# Altium PCB ad.pcbdoc
Units mil, origin at the board's own origin, x right, y up, seen from the top; angles counter-clockwise.
Board outline 9530 x 6960 mil, 2 copper layers (Top Layer, Bottom Layer); 83 components, 111 nets, 307 pads, 83 vias.
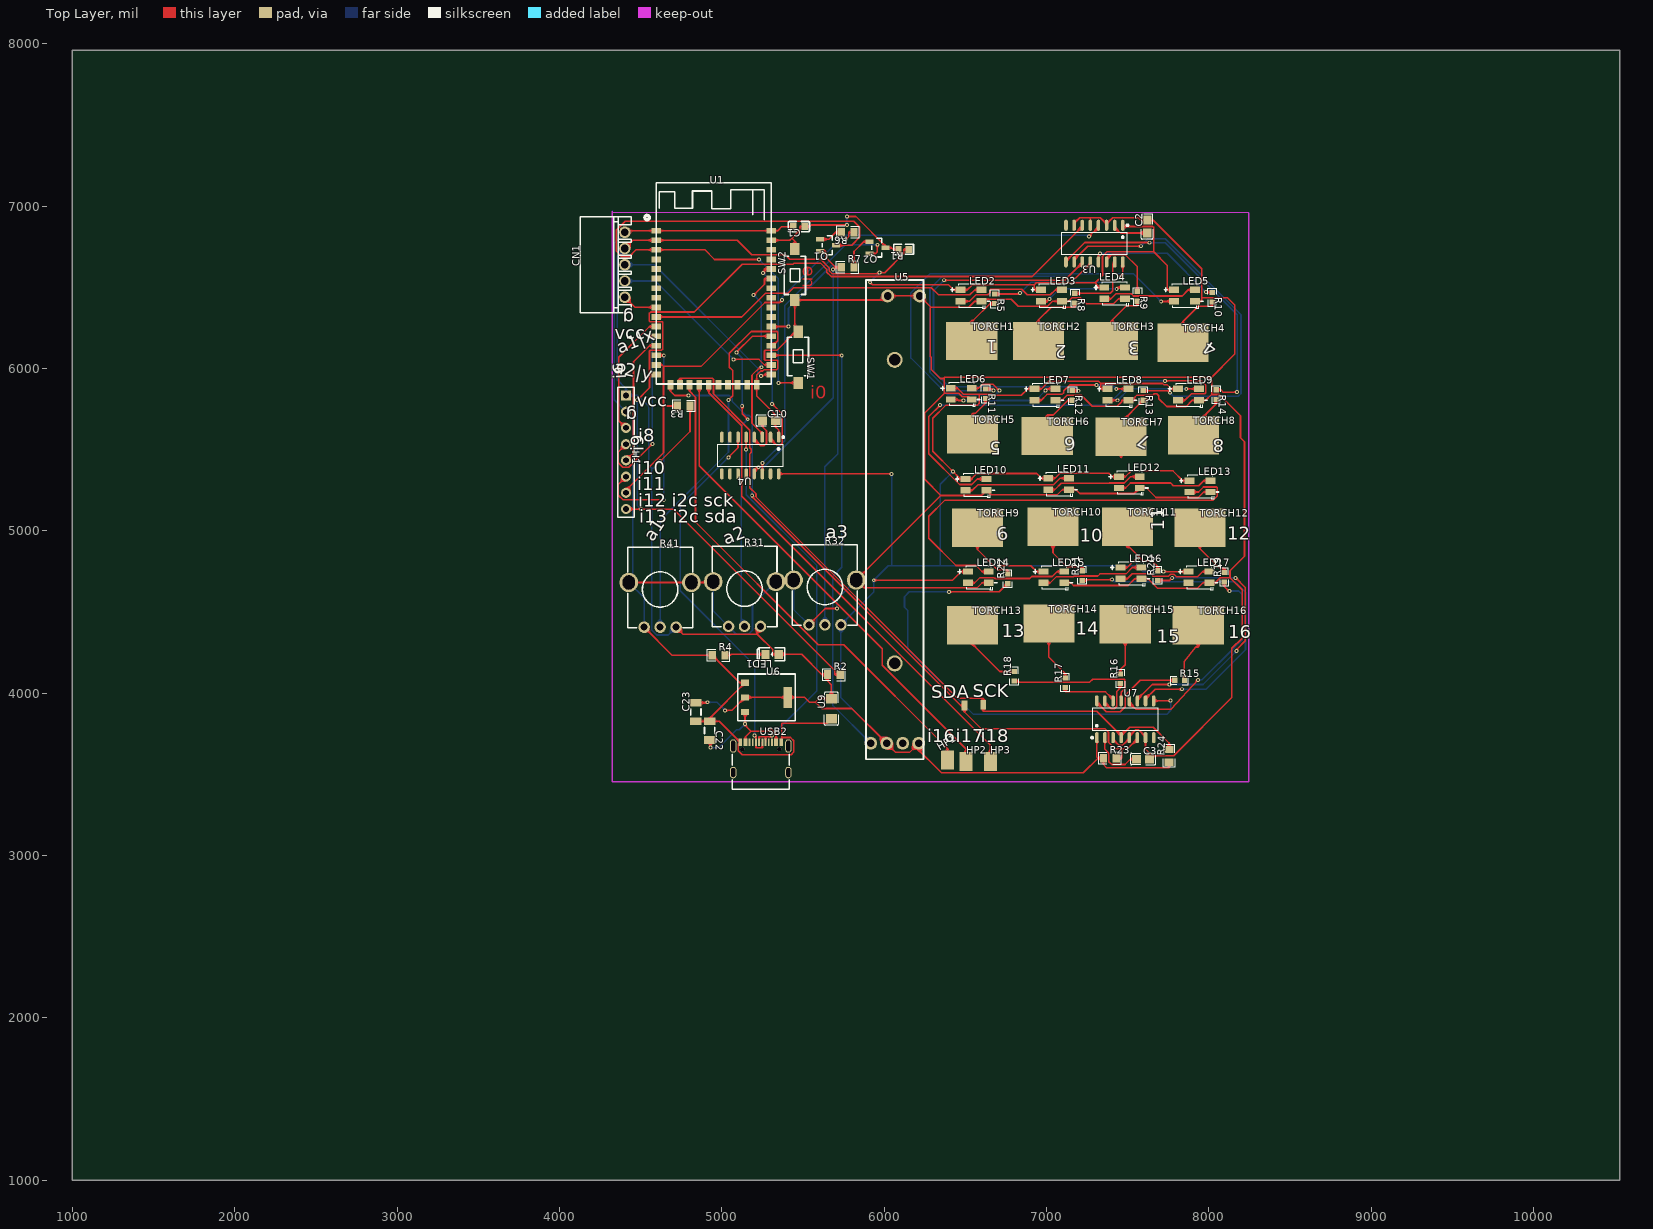
[diagram p0: Top Layer view]
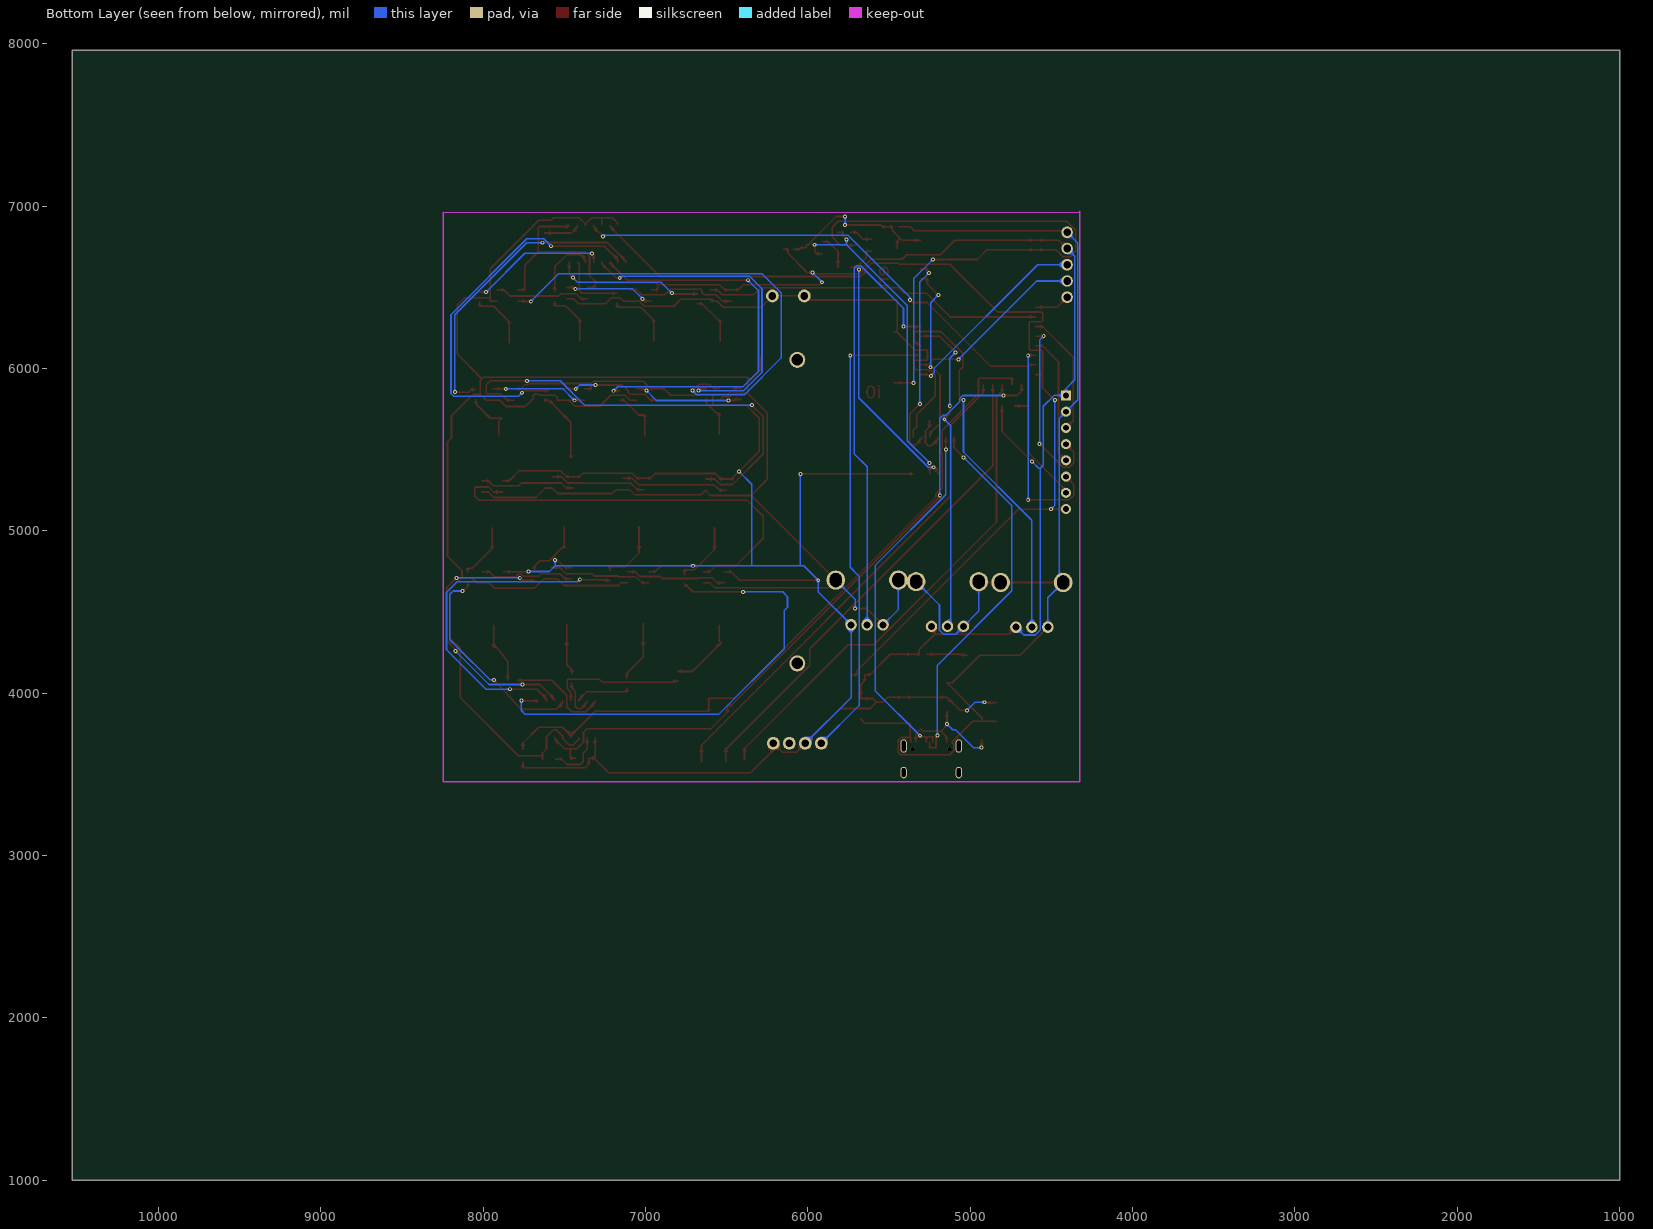
[diagram p1: Bottom Layer view, seen from below]

## Layer stack, top to bottom
Top Layer: signal copper (thickness not stored)
Dielectric: dielectric 12.6, FR-4, Dk 4.8
Bottom Layer: signal copper (thickness not stored)

## Board outline
10530,1000 1000,1000 1000,7960 10530,7960

## Components (designator, comment, footprint, x,y, rotation, side; value= is the part's Value field where it differs from the comment)
C1 "1u" C0603 5475,6875 r180 top
C2 "100nF" C0805 7620,6875 r90 top
C3 "100nF" C0805 7595,3595 r0 top
C10 "1uF" C0805 5290,5680 r0 top
C22 "10u" C1206#1 4925,3770 r270 top
C23 "10u" C1206#1 4840,3885 r90 top
CN1 "5264-5AWD" CONN-TH_5P-P2.50_5264-5AWD 4375,6640 r90 top
H1 "HDR-F-2.54_1x8" HDR-F-2.54_1X8 4410,5535 r270 top
HP1 "焊盘" 焊盘 6390,3590 r0 top
HP2 "焊盘" 焊盘 6505,3580 r0 top
HP3 "焊盘" 焊盘 6655,3580 r0 top
LED1 "LED-0805_G" LED0805_GREEN 5310,4240 r180 top
LED2 "WS2812B-MINI" LED-SMD_4P-L3.5-W3.5-TL_WS2812B 6535,6450 r0 top
LED3 "WS2812B-MINI" LED-SMD_4P-L3.5-W3.5-TL_WS2812B 7030,6450 r0 top
LED4 "WS2812B-MINI" LED-SMD_4P-L3.5-W3.5-TL_WS2812B 7420,6465 r0 top
LED5 "WS2812B-MINI" LED-SMD_4P-L3.5-W3.5-TL_WS2812B 7850,6450 r0 top
LED6 "WS2812B-MINI" LED-SMD_4P-L3.5-W3.5-TL_WS2812B 6475,5845 r0 top
LED7 "WS2812B-MINI" LED-SMD_4P-L3.5-W3.5-TL_WS2812B 6990,5840 r0 top
LED8 "WS2812B-MINI" LED-SMD_4P-L3.5-W3.5-TL_WS2812B 7440,5840 r0 top
LED9 "WS2812B-MINI" LED-SMD_4P-L3.5-W3.5-TL_WS2812B 7875,5840 r0 top
LED10 "WS2812B-MINI" LED-SMD_4P-L3.5-W3.5-TL_WS2812B 6565,5285 r0 top
LED11 "WS2812B-MINI" LED-SMD_4P-L3.5-W3.5-TL_WS2812B 7075,5290 r0 top
LED12 "WS2812B-MINI" LED-SMD_4P-L3.5-W3.5-TL_WS2812B 7510,5300 r0 top
LED13 "WS2812B-MINI" LED-SMD_4P-L3.5-W3.5-TL_WS2812B 7945,5275 r0 top
LED14 "WS2812B-MINI" LED-SMD_4P-L3.5-W3.5-TL_WS2812B 6580,4715 r0 top
LED15 "WS2812B-MINI" LED-SMD_4P-L3.5-W3.5-TL_WS2812B 7045,4715 r0 top
LED16 "WS2812B-MINI" LED-SMD_4P-L3.5-W3.5-TL_WS2812B 7520,4740 r0 top
LED17 "WS2812B-MINI" LED-SMD_4P-L3.5-W3.5-TL_WS2812B 7940,4715 r0 top
Q1 "S8050" SOT-23-3_L2.9-W1.3-P1.90-LS2.4-BR 5655,6760 r180 top
Q2 "S8050" SOT-23-3_L2.9-W1.3-P1.90-LS2.4-BR 5960,6745 r180 top
R1 "10k" R0603#1 6120,6735 r180 top
R2 "4.7kΩ" R0805 5690,4115 r0 top
R3 "4.7kΩ" R0805 4765,5770 r180 top
R4 "1kΩ" R0805 4980,4235 r0 top
R5 "1kΩ" R0603#2 6680,6430 r270 top
R6 "10kΩ" R0805 5775,6840 r180 top
R7 "10kΩ" R0805 5775,6625 r0 top
R8 "1kΩ" R0603#2 7175,6435 r270 top
R9 "1kΩ" R0603#2 7560,6445 r270 top
R10 "1kΩ" R0603#2 8020,6440 r270 top
R11 "1kΩ" R0603#2 6625,5845 r270 top
R12 "1kΩ" R0603#2 7160,5835 r270 top
R13 "1kΩ" R0603#2 7595,5835 r270 top
R14 "1kΩ" R0603#2 8045,5840 r270 top
R15 "1kΩ" R0603#2 7820,4080 r0 top
R16 "1kΩ" R0603#2 7455,4090 r90 top
R17 "1kΩ" R0603#2 7115,4065 r90 top
R18 "1kΩ" R0603#2 6800,4105 r90 top
R19 "1kΩ" R0603#2 8095,4715 r90 top
R20 "1kΩ" R0603#2 7685,4725 r90 top
R21 "1kΩ" R0603#2 7220,4725 r90 top
R22 "1kΩ" R0603#2 6760,4705 r90 top
R23 "4.7kΩ" R0805 7390,3600 r0 top
R24 "4.7kΩ" R0805 7755,3615 r90 top
R31 "10kΩ" RES-ADJ-TH_RK09K1130AJ3 5140,4550 r0 top
R32 "10kΩ" RES-ADJ-TH_RK09K1130AJ3 5635,4560 r0 top
R41 "10kΩ" RES-ADJ-TH_RK09K1130AJ3 4620,4545 r0 top
SW1 "TS-1101-C-W" SW-SMD_L6.0-W3.3-LS8.0 5470,6070 r270 top
SW2 "TS-1101-C-W" SW-SMD_L6.0-W3.3-LS8.0 5450,6580 r90 top
TORCH1 "torch 4x6" ?单面焊盘 6540,6170 r0 top
TORCH2 "torch 4x6" ?单面焊盘 6950,6170 r0 top
TORCH3 "torch 4x6" ?单面焊盘 7405,6170 r0 top
TORCH4 "torch 4x6" ?单面焊盘 7840,6160 r0 top
TORCH5 "torch 4x6" ?单面焊盘 6545,5595 r0 top
TORCH6 "torch 4x6" ?单面焊盘 7005,5585 r0 top
TORCH7 "torch 4x6" ?单面焊盘 7460,5580 r0 top
TORCH8 "torch 4x6" ?单面焊盘 7905,5590 r0 top
TORCH9 "torch 4x6" ?单面焊盘 6575,5020 r0 top
TORCH10 "torch 4x6" ?单面焊盘 7040,5025 r0 top
TORCH11 "torch 4x6" ?单面焊盘 7500,5025 r0 top
TORCH12 "torch 4x6" ?单面焊盘 7945,5020 r0 top
TORCH13 "torch 4x6" ?单面焊盘 6545,4420 r0 top
TORCH14 "torch 4x6" ?单面焊盘 7015,4430 r0 top
TORCH15 "torch 4x6" ?单面焊盘 7485,4425 r0 top
TORCH16 "torch 4x6" ?单面焊盘 7935,4420 r0 top
U1 "ESP32S2" ESP32S2 4595,6850 r0 top
U3 "SCT80S16B" SOP-16_L10.0-W3.9-P1.27-LS6.0-BL 7295,6770 r180 top
U4 "CH340C" SOP-16_L10.0-W3.9-P1.27-LS6.0-BL 5175,5465 r180 top
U5 "B10K滑动电位器" B10K 6065,5070 r0 top
U6 "AMS1117-3.3" AM1117 5275,3975 r0 top
U7 "SCT80S16B" SOP-16_L10.0-W3.9-P1.27-LS6.0-BL 7485,3840 r0 top
U9 "10uF" C1206#2 5675,3905 r90 top
USB2 "TYPE-C16PIN" USB-C-SMD_TYPE-C16PIN 5240,3605 r0 top

## Footprints (in the part's own frame and the unit in brackets; to place one, negate y for a bottom-side part, rotate by r counter-clockwise, add the part's x,y. Pads: shape width x height; smd on the part's side, far side on the other; paste and mask are expansions set on the pad)
?单面焊盘 [mm]
  rect 8x6 smd paste+0 mask+0.102: 1(0,0)
AM1117 [mm]
  rect 1.3x0.95 smd paste+0 mask+0.051: 1(-3.35,2.29) 2(-3.35,0) 3(-3.35,-2.29)
  rect 1.3x3.25 smd paste+0 mask+0.051: 4(3.35,0)
  silkscreen extent -4.5,-3.65 4.5,3.65
B10K [mm]
  round 2 hole 1.2 paste+0 mask+0.102: 1a(-1.25,-35) 1b(3.75,-35) 2a(-3.75,-35) 2b(1.25,-35) 3a(-1.102,35) 3b(3.898,35)
  round 2.5 hole 1.8 paste+0 mask+0.102: 9(0,25) 10(0,-22.5)
  silkscreen extent -4.5,-37.5 4.5,37.5
C0603 [mm]
  rect 1x1.1 smd paste+0 mask+0.102: 1(-0.9,0) 2(0.9,0)
  silkscreen extent -1.65,-0.8 1.65,0.8
C0805 [mm]
  rect 1.41x1.35 smd paste-100 mask+0.051: 1(-1,0) 2(1,0)
  silkscreen extent -1.96,-0.9 1.96,0.9
C1206#1 [mm]
  rect 1.2x1.8 smd paste+0 mask+0.051: 1(-1.45,0) 2(1.45,0)
  silkscreen extent -0.5,-0.8 0.5,0.8
C1206#2 [mm]
  rect 1.485x1.728 smd paste-100 mask+0.051: 1(-1.593,0) 2(1.593,0)
  silkscreen extent -2.56,-1.09 2.56,1.09
CONN-TH_5P-P2.50_5264-5AWD [mm]
  round 1.8 hole 1.2 paste+0 mask+0.051: 1(-5.08,-0.7) 2(-2.54,-0.7) 3(0,-0.7) 4(2.54,-0.7) 5(5.08,-0.7)
  silkscreen extent -7.5,-1.7 7.5,6.3
ESP32S2 [mm]
  rect 1.5x0.9 smd paste+0 mask+0.051: 1(0,-0.006) 2(0,-1.505) 3(0,-3.006) 4(0,-4.505) 5(0,-6.006) 6(0,-7.505) 7(0,-9.006) 8(0,-10.505) 9(0,-12.006) 10(0,-13.505) 11(0,-15.006) 12(0,-16.505) 13(0,-18.006) 14(0,-19.505) 15(0,-21.006) 16(0,-22.505) 27(18,-22.505) 28(18,-21.006) 29(18,-19.505) 30(18,-18.006) 31(18,-16.505) 32(18,-15.006) 33(18,-13.505) 34(18,-12.006) 35(18,-10.505) 36(18,-9.006) 37(18,-7.505) 38(18,-6.006) 39(18,-4.505) 40(18,-3.006) 41(18,-1.505) 42(18,-0.006)
  rect 0.9x1.5 smd paste+0 mask+0.051: 17(2.25,-24.1) 18(3.75,-24.1) 19(5.25,-24.1) 20(6.75,-24.1) 21(8.25,-24.1) 22(9.75,-24.1) 23(11.25,-24.1) 24(12.75,-24.1) 25(14.25,-24.1) 26(15.75,-24.1)
  silkscreen extent -1.76,-24 18,7.5
HDR-F-2.54_1X8 [mil]
  rect 62x62 hole 35 paste+0 mask+2: 1(-300,0)
  round 62 hole 35 paste+0 mask+2: 2(-200,0) 3(-100,0) 4(0,0) 5(100,0) 6(200,0) 7(300,0) 8(400,0)
  silkscreen extent -350,-50 450,50
LED0805_GREEN [mil]
  rect 51.2x55.1 smd paste+0 mask+2: 1(-41.35,0) 2(41.35,0)
  silkscreen extent -79,-39 91,39
LED-SMD_4P-L3.5-W3.5-TL_WS2812B [mm]
  rect 1.545x0.997 smd paste+0 mask+0.051: 1(-1.638,0.89) 2(-1.638,-0.89) 3(1.638,-0.89) 4(1.638,0.89)
  silkscreen extent -3.17,-2.04 2.92,1.82
R0603#1 [mm]
  rect 1x1.1 smd paste+0 mask+0.102: 1(-0.8,0) 2(0.8,0)
  silkscreen extent -1.55,-0.8 1.55,0.81
R0603#2 [mm]
  rect 0.806x0.864 smd paste-100 mask+0.051: 1(-0.753,0) 2(0.753,0)
  silkscreen extent -1.39,-0.66 1.39,0.66
R0805 [mil]
  rect 44.59x54.21 smd paste-3937.01 mask+2: 1(-39.37,0) 2(39.37,0)
  silkscreen extent -69,-36 69,36
RES-ADJ-TH_RK09K1130AJ3 [mm]
  round 1.8 hole 1.1 paste+0 mask+0.051: 1(-2.5,-3.5) 2(0,-3.5) 3(2.5,-3.5)
  oval 2.9x3 hole 1.9 slot 2.2 at 90 deg paste+0 mask+0.051: 4(-4.9,3.5) 5(4.9,3.5)
  silkscreen extent -5.08,-3.56 5.08,9.02
SOP-16_L10.0-W3.9-P1.27-LS6.0-BL [mm]
  oval 0.56x1.745 smd paste+0 mask+0.051: 1(-4.445,-2.873) 2(-3.175,-2.873) 3(-1.905,-2.873) 4(-0.635,-2.873) 5(0.635,-2.873) 6(1.905,-2.873) 7(3.175,-2.873) 8(4.445,-2.873) 9(4.445,2.873) 10(3.175,2.873) 11(1.905,2.873) 12(0.635,2.873) 13(-0.635,2.873) 14(-1.905,2.873) 15(-3.175,2.873) 16(-4.445,2.873)
  silkscreen extent -5.33,-3.02 5.08,1.77
SOT-23-3_L2.9-W1.3-P1.90-LS2.4-BR [mm]
  rect 1.25x0.7 smd paste+0 mask+0.102: 1(1.25,-0.95) 2(1.25,0.95) 3(-1.25,0)
  silkscreen extent -0.65,-1.46 0.9,1.46
SW-SMD_L6.0-W3.3-LS8.0 [mm]
  rect 1.9x1.5 smd paste+0 mask+0.051: 1(-4,0) 2(4,0)
  silkscreen extent -3.14,-1.67 2.86,1.63
USB-C-SMD_TYPE-C16PIN [mm]
  oval 1x2.1 hole 0.6 slot 1.7 at 90 deg paste+0 mask+0.051: 1(-4.32,1.787) 2(4.32,1.787)
  oval 1x1.8 hole 0.6 slot 1.4 at 90 deg paste+0 mask+0.051: 3(-4.32,-2.362) 4(4.32,-2.362)
  rect 0.6x1.15 smd paste-100 mask+0.051: A1B12(-3.2,2.362) A4B9(-2.4,2.362) B1A12(3.2,2.362) B4A9(2.4,2.362)
  rect 0.3x1.15 smd paste-100 mask+0.051: A5(-1.25,2.362) A6(-0.25,2.362) A7(0.25,2.362) A8(-1.75,2.362) B5(1.75,2.362) B6(0.75,2.362) B7(-0.75,2.362) B8(1.25,2.362)
  round 0.65 hole 0.65 unplated paste+0: ""(-2.89,1.288) ""(2.89,1.288)
  silkscreen extent -4.45,-5 4.45,0.52
焊盘 [mm]
  rect 2x3 smd paste+0 mask+0.051: 1(0,0)

## Free pads (board coordinates)
  rect 35.43x59.05 smd paste+0 mask+2: 1(6495,3925) 2(6610,3930)

## Via types
v1: diameter 24.02, hole 12.01, Top Layer to Bottom Layer, tented both sides, 75 vias
v2: diameter 24.41, hole 12.2, Top Layer to Bottom Layer, tented both sides, 8 vias

## Nets (pads, with @x,y where several pads share a name; then routed paths per layer and width w, separated by ;. In a path a pad name is that pad's centre, name@x,y a point inside that pad or via, vN(x,y) a via of type N, cw(c..) or ccw(c..) an arc to the next point about the centre after c; other vN are vias at no path point)
ADC1: R41.2 U1.30 | length 2342.7
  Top Layer w10: v1(5041.14,5806.54) 5066.7,5832.1 5066.7,5988.7 5046.7,6008.7 5046.7,6094.5 5181.2,6229 5341.3,6229 5344.2,6226 5344.2,6171.7 5313.7,6141.1 U1.30
  Bottom Layer w10: R41.2 4620,5065.24 5041.14,5486.38 v1(5041.14,5806.54)
ADC2: R31.2 U1.31 | length 1997.5
  Top Layer w10: v1(5089.27,6100.27) 5189.2,6200.2 U1.31 ; v1(5125.75,5770.33) 5125.75,5722.38 v1(5159.86,5688.27)
  Bottom Layer w10: v1(5089.27,6100.27) 5125.75,6063.79 v1(5125.75,5770.33) ; R31.2 5120.52,4431.68 5120.52,5648.93 v1(5159.86,5688.27)
ADC3: R32.2 U1.32 | length 2867.4
  Top Layer w10: U1.32 v1(5410.86,6259.23)
  Bottom Layer w10: v1(5410.86,6259.23) 5410.86,6371.1 5673.71,6633.95 5699.04,6633.95 5714.71,6618.28 5714.71,5474.56 5635,5394.85 R32.2
C10_1: C10.1 U4.4 | length 261.1
  Top Layer w10: U4.4 5200,5564.1 5239.3,5524.7 5258.4,5524.7 5275,5541.3 5275,5618.1 5250.6,5642.4 C10.1
CN1_1: CN1.1 U1.9 | length 218.4
  Top Layer w10: CN1.1 4465.2,6377.3 U1.9
CN1_2: CN1.2 U1.28 | length 1115.3
  Top Layer w10: v1(5072.76,6056.8) 5229.35,6056.8 5263.14,6023.01 ; 5263.1,6023 U1.28
  Bottom Layer w10: CN1.2 4589.56,6540 v1(5072.76,6056.8)
CN1_3: CN1.3 U1.27 | length 1203.9
  Top Layer w10: v1(5241.91,5955.55) 5254.73,5955.55 5263.14,5963.96 ; 5263.1,5964 U1.27
  Bottom Layer w10: CN1.3 4584.34,6640 5220.42,6003.92 5220.42,5977.04 v1(5241.91,5955.55)
D+: U4.5 USB2.A6 USB2.B6 | length 2283.1
  Top Layer w10: v1@5150,5502.9 U4.5 ; 5230.15,3731.64 5230.22,3731.71 5269.52,3731.71 ; USB2.A6 5230.2,3731.6 ; USB2.B6 USB2.B6@5269.52,3714.83 ; USB2.B6@5269.5,3714.8 5269.5,3731.6 ; 5269.52,3731.64 5269.52,3731.71 ; v1(5308.29,3738.75) 5301.25,3731.71 5269.52,3731.71
  Bottom Layer w10: v1(5150,5502.85) 5150,5223.28 5585.79,4787.49 5585.79,4016.25 v1(5308.29,3738.75)
D-: U4.6 USB2.A7 USB2.B7 | length 2327.5
  Top Layer w10: v1(5040.25,5452.88) 5100,5512.6 U4.6 ; v1@5201.7,3740.4 5210.5,3731.6 USB2.B7 ; 5210.47,3664.38 5210.54,3664.31 5249.77,3664.31 5249.84,3664.38 ; USB2.B7@5210.47,3681.2 USB2.B7 ; 5210.5,3664.4 USB2.B7@5210.5,3681.2 ; 5249.8,3664.4 USB2.A7
  Bottom Layer w10: v1(5040.25,5452.88) 4744.01,5156.64 4744.01,4631.5 5201.75,4173.76 v1(5201.75,3740.36)
DTR: Q1.2 R7.1 U4.13 | length 1692
  Top Layer w10: U4.13 5200,5366.9 v1(5225.75,5392.62) ; Q1.2 5641.4,6722.6 5641.4,6683.42 5699.82,6625 ; v1(5685.65,6610.83) 5699.82,6625 ; R7.1 5699.8,6625
  Bottom Layer w10: v1(5225.75,5392.62) 5257.63,5392.62 5685.65,5820.64 v1(5685.65,6610.83)
EN: C1.1 Q2.3 R1.2 SW2.2 U1.41 | length 1055.8
  Top Layer w10: U1.41 5418.5,6790.7 5431.8,6804.1 ; SW2.2 5450,6785.9 ; 5450,6785.87 5431.82,6804.06 5479.76,6852 5479.76,6875 ; 5479.8,6875 5495.1,6875 C1.1 ; C1.1 5541.1,6875 5551.26,6885.15 v1(5769.94,6885.15) ; v1(5769.94,6936.87) 5826.2,6936.9 Q2.3@6018.1,6745 ; Q2.3 Q2.3@6018.1,6745 ; R1.2 6054.8,6735 6044.8,6745 Q2.3@6018.1,6745
  Bottom Layer w10: v1(5769.94,6885.15) v1(5769.94,6936.87)
GND: C1.2 C2.2 C3.2 C10.2 C22.1 C23.1 CN1.5 H1.2 LED2.3 LED3.3 LED4.3 LED5.3 LED6.3 LED7.3 LED8.3 LED9.3 LED10.3 LED11.3 LED12.3 LED13.3 LED14.3 LED15.3 LED16.3 LED17.3 R4.1 R31.1 R31.4 R31.5 R32.1 R32.4 R32.5 R41.1 R41.4 R41.5 SW1.1 SW2.1 U1.1 U1.26 U1.42 U3.3 U3.5 U3.7 U4.1 U5.3a U5.3b U6.1 U7.3 U7.5 U7.7 U9.1 USB2.A1B12 USB2.B1A12 | length 25656.1
  Top Layer w10: CN1.5 4412.3,6849.8 U1.1 5263.1,6849.8 U1.42 ; R41.4 R41.5 4942.1,4682.8 R31.4 ; R41.1 4693.8,4235 R4.1 5110.5,4065.2 U6.1 4925,3847.1 C22.1 ; C23.1 C22.1 ; 5215.08,5860.66 5215.08,5831.86 5329.37,5717.57 ; 5215.1,5860.7 5215.1,5880.9 U1.26 5215.1,5941.7 5215.1,5961.3 5239.3,5985.6 5253,5985.6 5261.7,5994.2 5337.8,5994.2 5344.2,6000.7 5344.2,6048.9 5341.3,6051.8 5267.5,6051.8 5263.1,6056.2 5263.1,6109.4 5266,6112.3 5337.8,6112.3 5450,6224.6 SW1.1@5450,6227.5 ; U1.42 5323.92,6849.78 5344.2,6849.8 5369.4,6875 C1.2 ; C10.2@5329.37,5661.22 C10.2 ; C10.2@5329.4,5661.2 5329.4,5642.4 5350,5621.8 U4.1 ; C10.2 5329.4,5717.6 ; R31.5 5342.9,4697.8 R32.4 ; USB2.B1A12 5366,3724 5370,3728.1 5422.8,3728.1 5442.9,3707.9 5442.9,3638.2 5426.9,3622.2 5125.6,3622.2 5101.5,3646.3 5101.5,3685.5 USB2.A1B12 4984.9,3827.1 C22.1 ; 5370,3728.06 5370,3812.15 5370,3816.17 ; 5370,3816.2 5648.9,3816.2 U9.1 ; SW1.1 SW1.1@5450,6227.48 ; R32.1 5636.8,4522.43 v1(5708.38,4522.43) ; U5.3a 5996.2,6422.5 SW2.1 SW1.1@5450,6227.5 ; U5.3a U5.3b 6288.09,6378.34 ; 6369.06,5947.97 7998.13,5947.97 8008.07,5938.03 8016.93,5929.17 8016.93,5841.02 7980.87,5804.96 ; 6371.25,5847.61 6369.06,5849.8 6369.06,5938.93 6346.07,5938.93 6290,5995 6290,6070 6285,6075 6285,6375.25 6288.09,6378.34 ; LED6.3 6522.5,5827 6480.5,5827 6459.8,5847.6 6371.3,5847.6 6250,5726.4 6250,5317.9 6349,5218.9 ; 6558.07,6414.96 6521.45,6378.34 6369.06,6378.34 6288.09,6378.34 ; 6558.1,6415 6578.8,6415 6591.1,6427.3 6783.1,6427.3 6826.1,6384.3 7006,6384.3 7036.7,6415 LED3.3 ; LED2.3@6578.77,6414.96 LED2.3 ; LED14.3@6623.77,4679.96 LED14.3 ; LED14.3@6623.8,4680 6603.1,4680 6572.4,4649.3 5876.4,4649.3 R32.5 6349,5218.9 ; LED10.3 LED10.3@6630.62,5249.96 ; LED7.3 LED7.3@7075.17,5804.96 ; LED7.3@7075.2,5805 7095.9,5805 ; LED3.3 LED3.3@7115.17,6414.96 ; 7095.87,5804.96 7126.49,5835.58 7214.48,5835.58 7282.08,5767.98 7434.13,5767.98 7463.07,5796.92 7463.07,5804.96 ; LED15.3 7150.9,4680 ; LED3.3@7115.2,6415 7135.9,6415 ; 7135.87,6414.96 7158.57,6437.66 7208.42,6437.66 7246.81,6399.27 7412.38,6399.27 7443.07,6429.96 ; LED11.3 LED11.3@7160.17,5254.96 ; LED11.3 7098.1,5255 7067.4,5224.3 6656.3,5224.3 6630.6,5250 6599.5,5218.9 6349,5218.9 ; 7150.87,4679.96 7166.4,4664.43 7502.54,4664.43 7543.07,4704.96 ; LED11.3@7160.2,5255 7180.9,5255 7204.9,5230.9 7540.5,5230.9 LED12.3 ; U3.7 7170,6894.8 7205.1,6929.9 7270,6929.9 ; U3.5 7270,6929.9 ; U3.3 U3.3@7370,6891.31 ; U7.3 7410,3717 7445.8,3681.2 7469.1,3681.2 7510,3722.1 U7.5 7510,3735.5 7550,3775.4 7566.9,3775.4 7610,3732.3 U7.7 7610,3656.9 7634.4,3632.6 7634.4,3615 7783.3,3615 8142,3973.7 8142,4277 8205,4340 8205,4637.6 8130.3,4712.3 8130.3,4755.3 8220,4845 8220,5549.6 8195,5574.6 8195,5710.5 8064.5,5841 8016.9,5841 ; 7443.1,6430 LED4.3 ; 7463.1,5805 LED8.3@7483.8,5805 ; LED8.3@7483.77,5804.96 LED8.3 ; LED8.3 7545.9,5805 ; 7543.1,4705 LED16.3 ; 7545.87,5804.96 7541.01,5821.01 7555,5835 7654.57,5835 7664.57,5845 7680,5845 7692.04,5832.96 7692.04,5815.28 7740.29,5767.02 7860.13,5767.02 7898.07,5804.96 ; LED12.3 LED12.3@7595.17,5264.96 ; LED16.3 LED16.3@7605.17,4704.96 ; LED12.3@7595.2,5265 7615.9,5265 ; LED16.3@7605.2,4705 7625.9,4705 ; 7615.87,5264.96 7674.56,5206.27 7934.38,5206.27 7968.07,5239.96 ; C2.2@7616.77,6914.37 C2.2 ; C2.2@7616.8,6914.4 7582.4,6914.4 7567.7,6929.1 7407.8,6929.1 U3.3@7370,6891.3 ; C2.2 7657.6,6914.4 ; 7625.87,4704.96 7684.78,4646.05 7929.16,4646.05 7963.07,4679.96 ; C3.2 C3.2@7634.37,3615 ; 7657.57,6914.37 7956.78,6615.16 7956.78,6437.28 ; 7898.1,5805 LED9.3 7980.9,5805 ; LED5.3 LED5.3@7935.17,6414.96 ; LED5.3@7935.2,6415 7955.8,6415 ; 7955.77,6414.96 7955.87,6414.96 7956.78,6415.87 7956.78,6437.28 ; 7963.1,4680 LED17.3 ; 7968.1,5240 LED13.3@7988.8,5240 ; LED13.3@7988.77,5239.96 LED13.3 ; LED17.3 LED17.3@8025.17,4679.96 ; 8008.1,5938 8160,6090 8160,6392.4 8115.1,6437.3 7956.8,6437.3 ; LED17.3@8025.2,4680 8045.9,4680 ; 8045.87,4679.96 8045.87,4687.62 8070.53,4712.28 8130.33,4712.28 ; 7270,6929.9 7331.4,6929.9 U3.3@7370,6891.3
  Bottom Layer w10: CN1.5 4337.06,6774.5 4337.06,5807.94 H1.2 4452.2,5692.8 4452.2,4707.9 R41.4 4521.6,4588.3 R41.1 ; R31.4 4947.1,4506.7 R31.1 5089.8,4363.9 5164.4,4363.9 5189.2,4388.8 5189.2,4544.1 R31.5 ; R32.4 5442.1,4516.7 R32.1 ; v1(5708.38,4522.43) 5708.4,4578.3 R32.5
IO0: Q1.3 SW1.2 U1.3 | length 3762.3
  Top Layer w10: v1(5229.41,6672.62) 4955,6672.6 4895.9,6731.7 U1.3 4471.2,6731.7 4429.5,6690 4383.6,6690 4349.4,6724.2 4349.4,6852.9 4404.7,6908.2 5813.2,6908.2 5850.5,6870.9 5850.5,6810.7 5799.8,6760 Q1.3 ; v1(5348.84,5912.52) SW1.2
  Bottom Layer w10: v1(5229.41,6672.62) 5348.66,6553.37 5348.66,5912.7 v1(5348.84,5912.52)
IO8: H1.3 U1.11 | length 761.4
  Top Layer w10: H1.3 4365.59,5679.41 4365.59,6070.34 4554.48,6259.23 ; 4554.5,6259.2 U1.11
IO9: H1.4 U1.12 | length 1138.8
  Top Layer w10: H1.4 4361.63,5486.63 4361.63,5420.72 4390.33,5392.02 4427.6,5392.02 v1(4572.5,5536.92) ; v1@4547.1,6200.2 U1.12
  Bottom Layer w10: v1(4547.05,6200.18) 4572.5,6174.73 v1(4572.5,5536.92)
IO10: H1.5 U1.13 | length 806.5
  Top Layer w10: H1.5 4455.7,5480.7 4455.7,6042.34 4554.48,6141.12 U1.13
IO11: H1.6 U1.14 | length 1365.3
  Top Layer w10: H1.6 4361.74,5286.74 4361.74,5220.61 4390.76,5191.59 v1(4642.56,5191.59) ; U1.14 v1(4642.56,6082.07)
  Bottom Layer w10: v1(4642.56,5191.59) v1(4642.56,6082.07)
IO12: H1.7 R3.2 U1.15 U3.4 | length 4071.2
  Top Layer w10: H1.7 4410,5251.35 4640.94,5482.29 4640.94,5770 4640.94,6013.62 4871.99,6013.62 5265.99,6407.62 5356.88,6407.62 v1(5371.72,6422.46) ; U1.15 4613.28,6023.01 4631.6,6023 4640.9,6013.6 ; 4640.9,5770 4709,5770 R3.2 ; v1(7262.29,6814.71) 7320,6872.4 U3.4
  Bottom Layer w10: v1(5371.72,6422.46) 5371.72,6441.06 5752.62,6821.96 7255.04,6821.96 v1(7262.29,6814.71)
IO13: H1.8 R2.2 U1.16 U3.6 | length 6209.3
  Top Layer w10: H1.8 v1(4501.11,5135) 4701.05,5135 5696.09,4139.96 5696.09,4115 R2.2 ; v1(4478.77,5805.78) 4554.48,5881.49 4554.48,5963.96 ; U3.6 7220,6876.1 6911.7,6567.8 5673.4,6567.8 5646.5,6594.6 5646.5,6611 5607.5,6650.1 5444.2,6650.1 5438,6643.8 5125.5,6643.8 4830.2,6348.6 4561.8,6348.6 4553.6,6340.4 4553.6,6293.7 4559.3,6288 4632.6,6288 4635.6,6285.1 4635.6,6118.8 4629.1,6112.3 4557.3,6112.3 4554.4,6109.4 4554.4,5964 4554.5,5964 ; 4554.5,5964 U1.16 4554.5,5964
  Bottom Layer w10: v1(4478.77,5805.78) 4478.77,5157.34 v1(4501.11,5135)
LED1_2: LED1.2 R4.2 | length 251.4
  Top Layer w10: R4.2 5052.7,4235 5057.7,4240 LED1.2@5268.7,4240
LED2_2: LED2.2 LED3.4 | length 690.1
  Top Layer w10: LED2.2 6526.1,6415 6565.5,6454.4 6637.3,6454.4 6651.9,6469 6651.9,6483.7 6657.2,6488.9 6847.4,6488.9 6881.9,6454.4 7022.4,6454.4 7053.1,6485 LED3.4
LED2_4: LED2.4 U1.10 | length 2110
  Top Layer w10: U1.10 5122.7,6318.3 5269.6,6465.2 5408.2,6465.2 5441.4,6498.4 6290.7,6498.4 6334.7,6454.4 6527.4,6454.4 6558.1,6485 LED2.4
LED3_2: LED3.2 LED4.4 | length 555.9
  Top Layer w10: LED3.2 7006.9,6415 ; 7006.93,6414.96 7006.93,6417.82 v1(7018.85,6429.74) ; v1(7432.54,6491.05) 7434.08,6491.05 7443.07,6500.04 ; 7443.1,6500 LED4.4
  Bottom Layer w10: v1(7018.85,6429.74) 7080.16,6491.05 v1(7432.54,6491.05)
LED4_2: LED4.2 LED5.4 | length 592.5
  Top Layer w10: LED4.2 7396.9,6430 ; 7396.93,6429.96 7427.62,6460.65 7522.47,6460.65 7535.4,6447.72 7835.75,6447.72 7873.07,6485.04 ; 7873.1,6485 LED5.4
LED5_2: LED5.2 LED6.4 | length 2986.4
  Top Layer w10: LED6.4 6580.9,5880 ; 6580.87,5880.04 6603.55,5902.72 6672.01,5902.72 v1(6709.83,5864.9) ; v1(7706.66,6413.74) 7742.91,6413.74 7744.13,6414.96 ; 7744.1,6415 LED5.2
  Bottom Layer w10: v1(6709.83,5864.9) 6684.76,5839.83 6390.66,5839.83 6164.96,6065.53 6164.96,6467.07 6282.66,6584.77 7535.63,6584.77 v1(7706.66,6413.74)
LED6_2: LED6.2 LED7.4 | length 676
  Top Layer w10: LED6.2 6451.9,5810 ; 6451.93,5809.96 6457.99,5803.9 v1(6489.87,5803.9) ; v1(6994.42,5864.74) 7004.7,5875 LED7.4
  Bottom Layer w10: v1(6489.87,5803.9) 6933.58,5803.9 v1(6994.42,5864.74)
LED7_2: LED7.2 LED8.4 | length 634.2
  Top Layer w10: LED7.2 6966.9,5805 ; 6966.93,5804.96 7003.18,5841.21 7095.77,5841.21 7106.77,5852.21 7106.77,5863.23 7142.46,5898.92 v1(7309.29,5898.92) ; v1(7429.6,5875.04) LED8.4
  Bottom Layer w10: v1(7309.29,5898.92) 7405.72,5898.92 v1(7429.6,5875.04)
LED8_2: LED8.2 LED9.4 | length 593
  Top Layer w10: LED8.2 7416.9,5805 ; 7416.93,5804.96 7417,5805.03 v1(7438.56,5805.03) ; v1(7860.86,5875.04) LED9.4
  Bottom Layer w10: v1(7438.56,5805.03) 7508.57,5875.04 v1(7860.86,5875.04)
LED9_2: LED9.2 LED10.4 | length 2721.5
  Top Layer w10: v1(6345,5775) 6275,5705 6275,5476.1 6464.7,5286.3 6539.5,5286.3 6573.2,5320 LED10.4 ; v1(7731.18,5924.91) 7955.27,5924.91 7980.94,5899.24 7980.94,5850.84 7974.46,5844.36 7891.33,5844.36 7851.93,5804.96 ; LED9.2 7851.9,5805
  Bottom Layer w10: v1(6345,5775) 7375.78,5775 7525.69,5924.91 v1(7731.18,5924.91)
LED10_2: LED10.2 LED11.4 | length 670
  Top Layer w10: LED10.2 6541.9,5250 6577.6,5285.6 7043.6,5285.6 7083,5325 LED11.4
LED11_2: LED11.2 LED12.4 | length 597.1
  Top Layer w10: LED11.2 7051.9,5255 7091.3,5294.3 7386.1,5294.3 7387.5,5295.6 7479.5,5295.6 7518.9,5335 LED12.4
LED12_2: LED12.2 LED13.4 | length 596.1
  Top Layer w10: LED12.2 7486.9,5265 ; 7486.93,5264.96 7517.62,5295.65 7764.69,5295.65 7780.99,5279.35 7937.38,5279.35 7968.07,5310.04 ; 7968.1,5310 LED13.4
LED13_2: LED13.2 LED14.4 | length 2654.5
  Top Layer w10: LED14.4 6603.1,4750 6565.5,4787.6 6442.4,4787.6 6275,4955 6275,5090 6375.2,5190.2 8026.9,5190.2 8050.9,5214.3 8050.9,5267.7 8048,5270.6 7966.8,5270.6 7936.1,5240 LED13.2
LED14_2: LED14.2 LED15.4 | length 627.4
  Top Layer w10: LED14.2 6556.9,4680 6590,4713 6677.1,4713 6682.6,4707.6 6896.7,4707.6 6908.5,4719.4 7036,4719.4 7066.7,4750 LED15.4
LED15_2: LED15.2 LED16.4 | length 643.4
  Top Layer w10: LED15.2 7021.9,4680 7061.1,4719.2 7166.7,4719.2 7169.8,4722.3 7316.7,4722.3 7330,4735.6 7489.5,4735.6 7528.9,4775 LED16.4
LED16_2: LED16.2 LED17.4 | length 590.8
  Top Layer w10: LED16.2 7496.9,4705 ; 7496.93,4704.96 7527.62,4735.65 7642.45,4735.65 7655.82,4722.28 7753.37,4722.28 7764.86,4733.77 7783.97,4733.77 7798.56,4719.18 7932.21,4719.18 7963.07,4750.04 ; 7963.1,4750 LED17.4
LED17_2: LED17.2
Q1_1: Q1.1 R6.2 | length 147.4
  Top Layer w10: Q1.1 5659.7,6797.4 5702.3,6840 R6.2
Q2_1: Q2.1 R7.2 | length 218.2
  Top Layer w10: R7.2 5814.4,6721.6 5875.2,6782.4 Q2.1
R5_2: R5.2 TORCH1.1 | length 311
  Top Layer w10: TORCH1.1 6540,6299.1 6550.6,6299.1 6651.8,6400.3 R5.2
R8_2: R8.2 TORCH2.1 | length 413.8
  Top Layer w10: TORCH2.1 6950,6299.1 7029.38,6378.48 7175,6378.48 R8.2
R9_2: R9.2 TORCH3.1 | length 347.9
  Top Layer w10: TORCH3.1 7405,6299.1 7494.38,6388.48 7560,6388.48 R9.2
R10_2: R10.2 TORCH4.1 | length 375
  Top Layer w10: TORCH4.1 7840,6289.1 7934.4,6383.5 8020,6383.5 R10.2
R11_2: R11.2 TORCH5.1 | length 262.6
  Top Layer w10: TORCH5.1 6545,5724.1 6560.62,5724.1 6625,5788.48 R11.2
R12_2: R12.2 TORCH6.1 | length 321.9
  Top Layer w10: TORCH6.1 7005,5714.1 7040.76,5714.1 7132,5805.34 ; 7132,5805.3 R12.2
R13_2: R13.2 TORCH7.1 | length 438.3
  Top Layer w10: 7460,5450.9 TORCH7.1 7460,5670.3 R13.2 7623,5805.3
R14_2: R14.2 TORCH8.1 | length 336.2
  Top Layer w10: TORCH8.1 7905,5674.1 7885,5694.1 7955.6,5694.1 8045,5783.5 R14.2
R15_2: R15.2 TORCH16.1 | length 379.4
  Top Layer w10: R15.2 7849.7,4196 7920,4285 7935,4285 TORCH16.1
R16_2: R16.2 TORCH15.1 | length 317.7
  Top Layer w10: R16.2 7455,4146.5 7485,4176.5 TORCH15.1
R17_2: R17.2 TORCH14.1 | length 376.7
  Top Layer w10: TORCH14.1 7015,4221.5 7115,4121.5 R17.2
R18_2: R18.2 TORCH13.1 | length 451.2
  Top Layer w10: TORCH13.1 6545,4320.9 6535,4310.9 6711.2,4134.7 R18.2
R19_2: R19.2 TORCH12.1 | length 355.3
  Top Layer w10: TORCH12.1 7945,4890.9 8064.38,4771.52 8095,4771.52 R19.2
R20_2: R20.2 TORCH11.1 | length 388.3
  Top Layer w10: TORCH11.1 7500,4895.9 7513.83,4895.9 7593.26,4816.47 7650.05,4816.47 7685,4781.52 R20.2
R21_2: R21.2 TORCH10.1 | length 401.5
  Top Layer w10: TORCH10.1 7040,4864.8 7123.3,4781.5 7220,4781.5 R21.2
R22_2: R22.2 TORCH9.1 | length 397.7
  Top Layer w10: TORCH9.1 6575,4890.9 6575,4885.37 6698.85,4761.52 6760,4761.52 R22.2
RTS: Q2.2 R6.1 U4.14 | length 2034.1
  Top Layer w10: U4.14 v1(5250,5418.63) ; v1(5761.66,6794.64) 5781.09,6814.07 5781.09,6840 R6.1 ; Q2.2 5946.4,6707.6 5958.37,6719.57 v1(5958.37,6763.06)
  Bottom Layer w10: v1(5250,5418.63) 5387.6,5556.23 5387.6,6389 5761.66,6763.06 ; v1(5761.66,6794.64) 5761.66,6763.06 ; v1(5958.37,6763.06) 5761.66,6763.06
RX: U1.38 U4.2 | length 1266.6
  Top Layer w10: v1(5254.12,6589.72) 5263.14,6598.74 5263.14,6613.56 ; 5263.1,6613.6 U1.38 ; U4.2 5300,5568.6 5336.9,5531.7 5363,5531.7 5372.1,5540.7 5372.1,5720.3 v1(5309.99,5782.42)
  Bottom Layer w10: v1(5254.12,6589.72) 5309.99,6533.85 v1(5309.99,5782.42)
S$26: 
S$28: 
S$30: 
S$32: 
S$34: 
S$36: 
S$44: 
S$46: 
S$48: 
S$50: 
S$52: 
S$54: 
TX: U1.37 U4.3 | length 1119.7
  Top Layer w10: v1(5196.03,6453.41) 5263.14,6520.52 5263.14,6554.51 ; v1(5243.48,6008.62) 5234.7,6008.6 5186.3,5960.2 5186.3,5663.6 5250,5599.9 U4.3 ; 5263.1,6554.5 U1.37
  Bottom Layer w10: v1(5196.03,6453.41) 5243.48,6405.96 v1(5243.48,6008.62)
U1_4: U1.4
U1_5: U1.5
U1_6: U1.6
U1_7: U1.7
U1_8: U1.8
U1_17: pad.1 R23.2 U1.17 U7.6 | length 4307.1
  Top Layer w10: 4683.58,5860.66 4709.86,5834.38 v1(4794.71,5834.38) ; 4683.6,5860.7 U1.17 ; v1@5187.3,5219 5187.3,5210 6472.2,3925 pad.1 6495,3884.5 6596.64,3782.84 7358.86,3782.84 7382.08,3759.62 7382.08,3698.92 7422.8,3658.2 7462.66,3658.2 7462.66,3600 ; R23.2 7462.7,3600 ; 7462.7,3658.2 7498.7,3658.2 7560,3719.5 U7.6
  Bottom Layer w10: v1(4794.71,5834.38) 5045.92,5834.38 5064.2,5816.1 5064.2,5797.05 5149.92,5711.33 5169.42,5711.33 5187.25,5693.5 v1(5187.25,5219)
U1_18: pad.2 R24.2 U1.18 U7.4 | length 4406.9
  Top Layer w10: U1.18 4742.6,5941.7 ; 4742.64,5941.7 4742.71,5941.77 4942.09,5941.77 4948.57,5935.29 4948.57,5844.67 5172.11,5621.13 5172.11,5513.36 5182.02,5503.45 5182.02,5484.33 5172.11,5474.42 5172.11,5266.75 5210.31,5228.55 5210.31,5209.77 6449.56,3970.52 6610,3970.52 pad.2 6610,3889.5 7310,3889.5 7460,3739.4 7512,3791.5 7657.9,3791.5 7755,3694.4 R24.2 ; U7.4 U7.4@7460,3739.44
U1_19: HP1.1 U1.19 | length 3061.1
  Top Layer w10: 4801.69,5860.66 4837.72,5824.63 4837.72,5055.32 5593.53,4299.51 5750.54,4299.51 6390,3660.05 ; 4801.7,5860.7 U1.19 ; HP1.1 6390,3660.1
U1_20: HP2.1 U1.20 | length 3002.2
  Top Layer w10: U1.20 4860.8,5402.7 5988,4275.4 5988,4172 6505,3655 HP2.1
U1_21: HP3.1 U1.21 | length 3039.9
  Top Layer w10: U1.21 4919.8,5850.7 5122.1,5648.5 5122.1,5214 6655,3681 HP3.1
U1_22: U1.22
U1_23: U1.23
U1_24: U1.24
U1_25: U1.25
U1_29: U1.29 U5.2a | length 2944
  Top Layer w10: U1.29 v1(5738.71,6082.07)
  Bottom Layer w10: v1(5738.71,6082.07) 5738.71,4775.83 5684.45,4721.57 5684.45,3924.95 U5.2a
U1_33: U1.33
U1_34: U1.34
U1_35: U1.35
U1_36: U1.36
U1_39: U1.39
U1_40: U1.40
U3_2: C2.1 U3.2 | length 226.1
  Top Layer w10: U3.2 7420,6872.2 7456.5,6835.6 C2.1
U3_9: R14.1 U3.9 | length 1902.7
  Top Layer w10: U3.9 7120,6661.5 7235.7,6777.2 7633.9,6777.2 v1(7635.41,6775.67) ; R14.1 8073,5869.7 ; 8073,5869.66 8087.06,5855.6 v1(8174.24,5855.6)
  Bottom Layer w10: v1(7635.41,6775.67) 7730.68,6775.67 8174.24,6332.11 v1(8174.24,5855.6)
U3_10: R13.1 U3.10 | length 2399.9
  Top Layer w10: U3.10 7170,6670 7254.1,6754.1 v1(7581.12,6754.1) ; R13.1 7747.6,5864.7 v1(7760.78,5851.47)
  Bottom Layer w10: v1(7581.12,6754.1) 7626.78,6799.76 7731.28,6799.76 8198.41,6332.63 8198.41,5846.35 8181.69,5829.63 7782.62,5829.63 v1(7760.78,5851.47)
U3_11: R12.1 U3.11 | length 2466.8
  Top Layer w10: v1(6368.62,6544.7) 7112.5,6544.7 7220,6652.2 U3.11 ; R12.1 v1@7188,5864.7 ; v1@7188,5864.66 7189.07,5863.59 v1(7196.2,5863.59)
  Bottom Layer w10: v1(6368.62,6544.7) 6303.95,6480.03 6303.95,5984.14 6399.84,5888.25 7171.54,5888.25 v1(7196.2,5863.59)
U3_12: R11.1 U3.12 | length 2073.8
  Top Layer w10: R11.1 6663.5,5874.7 v1@6673.3,5864.9 ; v1(7158.79,6558.43) 7181,6558.4 7270,6647.4 U3.12
  Bottom Layer w10: v1(6673.25,5864.9) 6395.13,5864.9 6282.44,5977.59 6282.44,6492.14 6358.38,6568.08 7149.14,6568.08 v1(7158.79,6558.43)
U3_13: R10.1 U3.13 | length 847
  Top Layer w10: U3.13 7320,6700.3 v1(7329.7,6710.02) ; v1(7981.63,6471.55) 7990.11,6471.55 v1@7992,6469.66 ; v1@7992,6469.7 R10.1
  Bottom Layer w10: v1(7329.7,6710.02) 7743.16,6710.02 v1(7981.63,6471.55)
U3_14: R9.1 U3.14 | length 401
  Top Layer w10: U3.14 7370,6670.9 7402.1,6702.9 7484.1,6702.9 7560,6627 R9.1
U3_15: R8.1 U3.15 | length 421.4
  Top Layer w10: R8.1 7392.9,6464.7 7408.1,6479.8 7408.1,6645 U3.15
U3_16: R5.1 U3.16 | length 914.6
  Top Layer w10: R5.1 6831.6,6459.7 v1(6837.8,6465.86) ; v1(7447.89,6561.6) 7470,6583.7 U3.16
  Bottom Layer w10: v1(6837.8,6465.86) 6904.95,6533.01 7419.3,6533.01 v1(7447.89,6561.6)
U7_2: C3.1 U7.2 | length 350.2
  Top Layer w10: U7.2 7360,3655.7 7384,3631.7 7384,3579.3 7401.4,3561.8 7483.7,3561.8 7516.9,3595 C3.1
U7_9: R22.1 U7.9 | length 2960.4
  Top Layer w10: v2(6400,4625) 6709.7,4625 R22.1 ; U7.9 7763.1,3953.1 v2(7765,3955)
  Bottom Layer w10: v2(6400,4625) 6155,4625 6125,4595 6125,4530 6145,4510 6145,4275 6550,3870 7740,3870 7765,3895 v2(7765,3955)
U7_10: R21.1 U7.10 | length 2148.4
  Top Layer w10: R21.1 7248,4695.3 ; 7248,4695.34 7252.7,4700.04 v1(7404.86,4700.04) ; U7.10 7610,3965.6 7669.7,4025.3 v1(7834.97,4025.29)
  Bottom Layer w10: v1(7404.86,4700.04) 7417.25,4687.65 8161.48,4687.65 8226.05,4623.08 8226.05,4268.71 7982.63,4025.29 v1(7834.97,4025.29)
U7_11: R20.1 U7.11 | length 1728.8
  Top Layer w10: U7.11 7560,3963.3 7650.7,4054 v1(7757.54,4053.98) ; R20.1 7759,4695.3 v1(7774.41,4710.71) ; v1(8165.46,4711.31) 8225,4651.8 8225,4323.8 8169.9,4268.7 v1(8169.91,4260.04)
  Bottom Layer w10: v1(7757.54,4053.98) 7963.85,4053.98 v1(8169.91,4260.04) ; v1(7774.41,4710.71) 7775.01,4711.31 v1(8165.46,4711.31)
U7_12: R19.1 U7.12 | length 1344.7
  Top Layer w10: U7.12 7510,3942.3 7549.3,3903 7768,3903 v2(7933.12,4082.82) ; R19.1 8095,4658.5 8125.9,4627.6 v2(8128.3,4630)
  Bottom Layer w10: v2(7933.12,4082.82) 7957.82,4082.82 8155.89,4280.89 8160,4280.89 8160,4285 8205,4330 8205,4610 8185,4630 v2(8128.3,4630)
U7_13: R18.1 U7.13 | length 836.4
  Top Layer w10: R18.1 6828,4075.3 6835.6,4067.7 7265.4,4067.7 7285,4087.3 7480.2,4087.3 7483.1,4084.4 7483.1,4030.5 7460,4007.4 U7.13
U7_14: R17.1 U7.14 | length 349.8
  Top Layer w10: R17.1 7115,4008.5 7363.2,4008.5 7410,3961.7 U7.14
U7_15: R16.1 U7.15 | length 254.5
  Top Layer w10: U7.15 7360,3943.6 7398.9,3904.7 7417.9,3904.7 7432.8,3919.6 7432.8,4011.3 7455,4033.5 R16.1
U7_16: R15.1 U7.16 | length 633.7
  Top Layer w10: U7.16 7310,3945.1 7368.5,3886.6 7454.3,3886.6 7485,3917.3 7485,3987.4 7577.6,4080 R15.1
VBUS: C22.2 U6.3 USB2.A4B9 USB2.B4A9 | length 798.1
  Top Layer w10: C22.2 4930,3707.9 v2(4930,3665) ; v2(5143.11,3810.13) U6.3 ; v2(5143.11,3810.13) 5143.11,3803.58 5180.28,3766.41 ; USB2.A4B9 5145.5,3731.6 ; 5145.51,3731.64 5180.28,3766.41 ; 5334.5,3731.6 USB2.B4A9 5334.5,3749.9 5303.8,3780.6 5289.6,3766.4 5180.3,3766.4
  Bottom Layer w10: v2(4930,3665) 4980,3665 5090,3775 5107.98,3775 v2(5143.11,3810.13)
VCC: C23.2 CN1.4 H1.1 LED1.1 LED2.1 LED3.1 LED4.1 LED5.1 LED6.1 LED7.1 LED8.1 LED9.1 LED10.1 LED11.1 LED12.1 LED13.1 LED14.1 LED15.1 LED16.1 LED17.1 R1.1 R2.1 R3.1 R23.1 R24.1 R31.3 R32.3 R41.3 U1.2 U3.1 U4.16 U5.1a U5.1b U6.2 U6.4 U7.1 U9.2 | length 22830.4
  Top Layer w10: CN1.4 4453.3,6790.7 U1.2 5094.3,6790.7 5183.6,6701.4 5390.5,6701.4 5417.9,6674 5609,6674 5662.6,6620.4 5662.6,6601.3 5678.2,6585.6 5965.1,6585.6 v1(5970.8,6591.35) ; v1(4619.12,5427.86) 4804.4,5613.1 R3.1 ; R41.3 4761.24,4364.38 5217.88,4364.38 ; C23.2 4908.7,3942.1 v2(4911.58,3945) ; v2(5020,3895) 5063.1,3895 U6.2 U6.4 5509.4,3975 5540,3944.4 5577.6,3944.4 5600.9,3967.7 U9.2 5675,4052.5 5650.6,4076.9 R2.1 5617.3,4115 5492.3,4240 LED1.1@5351.3,4240 ; R31.3 5217.88,4391.66 5217.88,4364.38 ; 5314.76,4240 5314.76,4267.5 5217.88,4364.38 ; 5314.8,4240 LED1.1@5333.1,4240 ; LED1.1@5333.06,4240 LED1.1 ; U4.16 v1(6046.3,5351.91) ; 5577.57,3944.37 5615.14,3906.8 5801.03,3906.8 U5.1a 6071.84,3635.99 6156.59,3635.99 U5.1b@6191.62,3671.02 ; v1(5912.1,6532.07) 5928.51,6515.66 6398.51,6515.66 6429.13,6485.04 ; v1(5935.8,4696.38) 6420.47,4696.38 6474.13,4750.04 ; v1(5970.8,6591.35) 6002.88,6591.35 6120.82,6709.29 6120.82,6735 R1.1 ; U5.1b U5.1b@6191.62,3671.02 ; LED6.1 6451.9,5880 ; v1(6424.11,5366.17) 6459.13,5331.15 6459.13,5320.04 ; v1(6424.11,5366.17) 6300,5490.3 6300,5695 6380.5,5775.5 6574.7,5775.5 6585.4,5786.3 6585.4,5843 ; 6429.1,6485 LED2.1 ; 6451.93,5880.04 6488.96,5843.01 6585.43,5843.01 6662.08,5843.01 6669.01,5836.08 6845.17,5836.08 6884.13,5875.04 ; 6459.1,5320 LED10.1 6541.9,5320 ; LED2.1 LED2.1@6491.23,6485.04 ; 6474.1,4750 LED14.1 ; LED2.1@6491.2,6485 6511.9,6485 ; 6511.93,6485.04 6542.71,6515.82 6924.13,6515.82 ; 6541.93,5320.04 6541.93,5325.78 6569.99,5353.84 6940.33,5353.84 6969.13,5325.04 ; v1(6707.4,4785.58) 6903.59,4785.58 6939.13,4750.04 ; 6884.1,5875 LED7.1 6966.9,5875 ; 6924.1,6485 LED3.1 ; 6924.13,6485.04 6924.13,6515.82 ; 6939.1,4750 LED15.1 ; 6966.93,5875.04 7013.87,5921.98 7320.44,5921.98 7334.13,5908.29 ; 6969.1,5325 LED11.1 7051.9,5325 ; 7051.93,5325.04 7082.62,5355.73 7383.44,5355.73 7404.13,5335.04 ; U7.1 7310,3607.3 7317.3,3600 R23.1 7350.6,3561.9 ; 7314.1,6500 LED4.1 ; 7314.13,6500.04 7314.13,6514.31 7299.91,6528.53 ; 7317.34,3600 7227.23,3509.89 6352.75,3509.89 U5.1b@6191.62,3671.02 ; 7334.1,5875 LED8.1 ; 7334.13,5875.04 7334.13,5908.29 ; 7350.63,3561.9 7370.19,3542.34 7755,3542.34 ; 7404.1,5335 LED12.1 ; LED12.1 LED12.1@7466.23,5335.04 ; LED16.1 7496.9,4775 ; LED12.1@7466.2,5335 7486.9,5335 7521.9,5370 7779.2,5370 7839.1,5310 LED13.1 ; U3.1 7477.5,6875.6 7654.7,6875.6 7660.1,6870.2 7660.1,6719.5 ; 7496.93,4775.04 7542.63,4820.74 v1(7556.37,4820.74) ; v1@7721.9,4750 LED17.1 ; 7744.1,6485 LED5.1 ; 7744.13,6485.04 7744.13,6635.45 7660.07,6719.51 7373.16,6719.51 7345,6691.35 7345,6573.62 7299.91,6528.53 ; 7755,3542.3 R24.1 ; 7769.1,5875 LED9.1 ; 7769.13,5875.04 7742.32,5901.85 7721.63,5901.85 7715.19,5908.29 7334.13,5908.29 ; 6924.13,6515.82 6936.84,6528.53 7299.91,6528.53
  Bottom Layer w10: CN1.4 4355.74,6693.18 4355.74,5931.25 4410,5876.99 H1.1 4482.2,5835 4549.4,5767.7 4549.4,5404.9 4568.8,5385.5 ; v1(4619.12,5427.86) 4576.78,5385.52 4568.82,5385.52 ; R41.3 4670.16,4358.94 4599.29,4358.94 4568.82,4389.41 4568.82,5385.52 ; v2@4905,3945 4970,3945 v2(5020,3895) ; v1(5912.1,6532.07) 5912.1,6532.65 v1(5970.8,6591.35) ; U5.1a 5733.42,3974.41 R32.3 5935.8,4624.58 v1(5935.8,4696.38) 6025,4785.58 6046.3,4785.58 ; v1(6046.3,5351.91) 6046.3,4785.58 ; v1(6424.11,5366.17) 6345,5287.1 6345,4785.6 6378.7,4785.6 ; v1(7556.37,4820.74) 7556.37,4785.58 ; v1(7721.85,4750.04) 7591.91,4750.04 7556.37,4785.58 ; 6046.3,4785.58 6378.72,4785.58 ; 6378.72,4785.58 v1(6707.4,4785.58) 7556.37,4785.58
pads on no net: U3.8 U4.7 U4.8 U4.9 U4.10 U4.11 U4.12 U4.15 U5.2b U5.9 U5.10 U7.8 USB2. USB2.1 USB2.2 USB2.3 USB2.4 USB2.A5 USB2.A8 USB2.B5 USB2.B8

## Polygon pours and split planes (outlines as drawn)
GND on Bottom Layer (solid): 3902.5,7102.5 3967.5,7037.5 8502.5,7037.5 8607.5,6932.5 8607.5,3177.5 4575,2545 4162.5,3517.5
GND on Top Layer (solid): 3300,7460 3320,7440 9300,7440 10030,6710 10030,1500 9620,1910 1500,1910

## Other copper
Top Layer:
  drawing of 321 lines, arcs and shapes, not listed
  text "en" at 5500,6635 h80 r270
  text "i0" at 5545,5815 h80
Bottom Layer:
  region net CN1_2: 4426,6513.43 4426,6566.57 4450.8,6545 4450.8,6535
  region net CN1_3: 4426,6613.43 4426,6666.57 4450.8,6645 4450.8,6635
  region net VCC: 4367.2,6742.22 4404.78,6704.64 4371.98,6702.35 4364.91,6709.43
  region net ADC2: 5154.85,4444.37 5106.22,4422.91 5115.52,4454.12 5125.52,4458.54
  region net VCC: 5731.2,4457.56 5768.78,4419.98 5771.06,4452.77 5763.99,4459.85
  region net VCC: 5759.99,4398.76 5706.84,4398.76 5728.42,4373.96 5738.42,4373.96
  region net ADC3: 5661.57,4445.64 5608.43,4445.64 5630,4470.44 5640,4470.44
  region net VCC: 4683.06,4409.42 4720.64,4371.84 4687.85,4369.55 4680.77,4376.62
  region net ADC1: 4646.57,4430.64 4593.43,4430.64 4615,4455.44 4625,4455.44
  region net U1_29: 5878.07,3689.58 5919.82,3731.33 5882.99,3733.48 5875.92,3726.41
  region net VCC: 5976.5,3689.58 6018.26,3731.33 5981.43,3733.48 5974.35,3726.41
  region net U1_17: 5178.24,5226.94 5196.26,5226.94 5192.25,5235.35 5182.25,5235.35
  region net U1_17: 4802.65,5825.37 4802.65,5843.39 4811.06,5839.38 4811.06,5829.38
  region net ADC3: 5401.85,6267.17 5419.87,6267.17 5415.86,6275.58 5405.86,6275.58
  region net D-: 5041,5440.9 5028.26,5453.63 5025.15,5444.86 5032.22,5437.79
  region net D-: 5192.74,3748.3 5210.75,3748.3 5206.75,3756.71 5196.75,3756.71
  region net D+: 5140.99,5494.91 5159.01,5494.91 5155,5486.5 5145,5486.5
  region net D+: 5320.28,3738 5307.54,3750.73 5316.32,3753.85 5323.39,3746.77
  region net RX: 5266.11,6590.47 5253.37,6577.73 5262.15,6574.62 5269.22,6581.69
  region net RX: 5300.98,5790.36 5319,5790.36 5314.99,5798.77 5304.99,5798.77
  region net U1_29: 5729.7,6074.13 5747.72,6074.13 5743.71,6065.72 5733.71,6065.72
  region net VCC: 6424.84,5354.18 6412.13,5366.94 6409,5358.17 6416.06,5351.09
  region net VCC: 5971.55,6579.37 5958.82,6592.1 5955.71,6583.33 5962.78,6576.25
  region net VCC: 5924.1,6531.62 5911.05,6544.03 5919.74,6547.36 5926.99,6540.47
  region net VCC: 7547.37,4812.8 7565.38,4812.8 7561.37,4804.39 7551.37,4804.39
  region net VCC: 7713.91,4741.03 7713.91,4759.05 7705.5,4755.04 7705.5,4745.04
  region net VCC: 6699.46,4776.58 6699.46,4794.59 6691.05,4790.58 6691.05,4780.58
  region net VCC: 6715.34,4776.58 6715.34,4794.59 6723.75,4790.58 6723.75,4780.58
  region net VCC: 4619.87,5415.87 4607.14,5428.61 4604.03,5419.84 4611.1,5412.76
  region net VCC: 6037.29,5343.97 6055.3,5343.97 6051.3,5335.56 6041.3,5335.56
  region net VCC: 5947.79,4695.63 5935.05,4708.36 5943.82,4711.47 5950.9,4704.4
  region net VCC: 5926.79,4688.44 5944.81,4688.44 5940.8,4680.03 5930.8,4680.03
  region net RTS: 5261.98,5417.88 5249.25,5430.61 5258.02,5433.73 5265.1,5426.65
  region net RTS: 5752.65,6786.7 5770.67,6786.7 5766.66,6778.29 5756.66,6778.29
  region net RTS: 5950.43,6754.05 5950.43,6772.07 5942.02,6768.06 5942.02,6758.06
  region net DTR: 5676.64,6602.89 5694.66,6602.89 5690.65,6594.48 5680.65,6594.48
  region net DTR: 5233.69,5383.61 5233.69,5401.63 5242.1,5397.62 5242.1,5387.62
  region net CN1_2: 5073.51,6068.78 5060.77,6056.05 5057.66,6064.82 5064.73,6071.89
  region net IO0: 5357.76,5920.56 5339.75,5920.36 5343.66,5928.81 5353.66,5928.92
  region net IO0: 5241.39,6673.37 5228.66,6660.64 5237.43,6657.52 5244.5,6664.6
  region net EN: 5760.94,6893.09 5778.95,6893.09 5774.94,6901.5 5764.94,6901.5
  region net EN: 5760.94,6928.93 5778.95,6928.93 5774.94,6920.52 5764.94,6920.52
  region net TX: 5208.01,6454.16 5195.28,6441.43 5204.05,6438.32 5211.13,6445.39
  region net TX: 5234.48,6016.56 5252.49,6016.56 5248.48,6024.97 5238.48,6024.97
  region net IO11: 4633.56,5199.53 4651.57,5199.53 4647.56,5207.94 4637.56,5207.94
  region net IO11: 4633.56,6074.13 4651.57,6074.13 4647.56,6065.72 4637.56,6065.72
  region net IO13: 4469.76,5797.84 4487.78,5797.84 4483.77,5789.43 4473.77,5789.43
  region net IO13: 4501.86,5146.98 4489.13,5134.25 4486.02,5143.02 4493.09,5150.1
  region net LED9_2: 7723.24,5915.9 7723.24,5933.92 7714.83,5929.91 7714.83,5919.91
  region net LED9_2: 6352.94,5765.99 6352.94,5784.01 6361.35,5780 6361.35,5770
  region net IO12: 5362.71,6430.4 5380.72,6430.4 5376.72,6438.81 5366.72,6438.81
  region net IO12: 7259.17,6826.3 7251.18,6810.16 7245.16,6816.96 7250.11,6826.96
  region net U7_11: 7782.68,4702 7782.02,4720 7790.56,4716.31 7790.93,4706.31
  region net U7_11: 8157.52,4702.31 8157.52,4720.32 8149.11,4716.31 8149.11,4706.31
  region net U7_11: 8170.66,4248.05 8157.93,4260.79 8154.82,4252.01 8161.89,4244.94
  region net U7_11: 7765.48,4044.97 7765.48,4062.99 7773.89,4058.98 7773.89,4048.98
  region net U3_13: 7982.38,6483.53 7969.65,6470.8 7966.54,6479.57 7973.61,6486.65
  region net U3_13: 7337.64,6701.01 7337.64,6719.03 7346.05,6715.02 7346.05,6705.02
  region net U3_16: 6849.78,6465.11 6837.05,6477.84 6845.82,6480.95 6852.89,6473.88
  region net U3_16: 7448.64,6549.61 7435.91,6562.35 7432.8,6553.57 7439.87,6546.5
  region net U3_12: 6665.31,5855.89 6665.31,5873.91 6656.9,5869.9 6656.9,5859.9
  region net U3_12: 7159.54,6570.41 7146.8,6557.68 7145.6,6564.55 7152.68,6571.62
  region net U3_11: 7196.95,5875.57 7184.22,5862.84 7181.11,5871.61 7188.18,5878.68
  region net U3_11: 6369.37,6532.72 6356.63,6545.45 6353.52,6536.68 6360.59,6529.6
  region net U3_10: 7772.77,5852.22 7760.03,5839.49 7768.81,5836.37 7775.88,5843.45
  region net U3_10: 7593.1,6753.35 7580.37,6766.08 7589.14,6769.19 7596.21,6762.12
  region net U3_9: 8165.23,5863.54 8183.24,5863.54 8179.24,5871.95 8169.24,5871.95
  region net U3_9: 7643.35,6766.66 7643.35,6784.67 7651.76,6780.67 7651.76,6770.67
  region net U7_10: 7416.84,4700.79 7404.11,4688.05 7412.88,4684.94 7419.95,4692.02
  region net U7_10: 7842.91,4016.28 7842.91,4034.3 7851.32,4030.29 7851.32,4020.29
  region net CN1_3: 5242.66,5967.53 5229.92,5954.8 5226.81,5963.57 5233.89,5970.65
  region net IO9: 4563.49,5544.86 4581.51,5544.86 4577.5,5553.27 4567.5,5553.27
  region net IO9: 4559.04,6200.93 4546.3,6188.2 4555.07,6185.08 4562.15,6192.16
  region net LED3_2: 7030.83,6428.99 7018.1,6441.73 7026.87,6444.84 7033.94,6437.77
  region net LED3_2: 7424.6,6482.04 7424.6,6500.06 7416.19,6496.05 7416.19,6486.05
  region net LED5_2: 7707.41,6425.72 7694.68,6412.99 7691.56,6421.76 7698.64,6428.84
  region net LED5_2: 6710.58,5852.92 6697.84,5865.65 6694.73,5856.87 6701.81,5849.8
  region net LED6_2: 6497.81,5794.89 6497.81,5812.9 6506.22,5808.9 6506.22,5798.9
  region net LED6_2: 6995.17,5852.76 6982.43,5865.49 6979.32,5856.72 6986.39,5849.65
  region net LED7_2: 7317.23,5889.91 7317.23,5907.93 7325.64,5903.92 7325.64,5893.92
  region net LED7_2: 7430.35,5887.02 7417.62,5874.29 7414.5,5883.06 7421.58,5890.13
  region net LED8_2: 7450.54,5804.28 7437.81,5817.01 7446.58,5820.12 7453.65,5813.05
  region net LED8_2: 7852.92,5866.03 7852.92,5884.05 7844.51,5880.04 7844.51,5870.04
  region net ADC2: 5160.61,5676.28 5147.87,5689.02 5144.76,5680.25 5151.83,5673.17
  region net ADC2: 5116.75,5778.27 5134.76,5778.27 5130.75,5786.68 5120.75,5786.68
  region net ADC2: 5101.25,6101.02 5088.52,6088.29 5097.29,6085.18 5104.36,6092.25
  region net ADC1: 5032.13,5798.6 5050.14,5798.6 5046.14,5790.19 5036.14,5790.19
  region net U7_9: 6391.93,4615.85 6391.93,4634.15 6383.38,4630 6383.38,4620
  region net U7_12: 7941.19,4073.67 7941.19,4091.97 7949.74,4087.82 7949.74,4077.82
  region net U7_12: 8136.37,4620.85 8136.37,4639.15 8144.92,4635 8144.92,4625
  region net U7_9: 7755.85,3946.93 7774.15,3946.93 7770,3938.38 7760,3938.38
  region net VBUS: 5143.87,3797.95 5130.93,3810.9 5127.83,3801.92 5134.9,3794.85
  region net VBUS: 4938.07,3655.85 4938.07,3674.15 4946.62,3670 4946.62,3660
  region net VCC: 5020.76,3907.18 5007.82,3894.24 5004.71,3903.21 5011.79,3910.29
  region net VCC: 4919.65,3935.85 4919.65,3954.15 4928.19,3950 4928.19,3940
  region net VCC: 4441,5847.5 4441,5822.5 4456,5830 4456,5840
  region net VCC: 4397.5,5866 4422.5,5866 4415,5877 4405,5877

## Silkscreen, mask and mechanical layers (free items; w line width, h text height)
Top Overlay:
  text "g" at 4460,6350 h80 r180
  text "vcc" at 4340,6180 h80
  text "1" at 6700,6175 h80 r180
  text "3" at 7575,6165 h80 r180
  text "2" at 7125,6145 h80 r180
  text "4" at 8058.51,6132.36 h80 r144
  text "a1|x" at 4369.98,6087.91 h80 r22
  text "a2|y" at 4326.68,5975.87 h80 r348
  text "i6" at 4409.95,5937.09 h80 r93
  text "vcc" at 4475,5765 h80
  text "g" at 4480,5750 h80 r180
  text "6" at 7176.51,5579.85 h80 r185
  text "7" at 7647.53,5570.95 h80 r154
  text "8" at 8095,5565 h80 r180
  text "i8" at 4485,5550 h80
  text "5" at 6720,5550 h80 r180
  text "i9" at 4520,5490 h80 r90
  text "i10" at 4480,5350 h80
  text "i11" at 4480,5250 h80
  text "i12 i2c sck" at 4485,5150 h80
  text "i13 i2c sda" at 4490,5050 h80
  text "9" at 6761.51,5024.85 h80 r185
  text "11" at 7725,5000 h80 r90
  text "a3" at 5640,4955 h80
  text "12" at 8115,4945 h80
  text "10" at 7205,4935 h80
  text "a1" at 4578.55,4928.21 h80 r57
  text "a2" at 5024.33,4912.66 h80 r21
  text "14" at 7180,4360 h80
  text "13" at 6725,4345 h80
  text "16" at 8120,4340 h80
  text "15" at 7680,4310 h80
  text "SCK" at 6545,3975 h80
  text "SDA" at 6290,3970 h80
  text "i16" at 6265,3700 h80
  text "i17" at 6440,3700 h80
  text "i18" at 6595,3700 h80